# Allegro board PULSE_MODULATION.brd
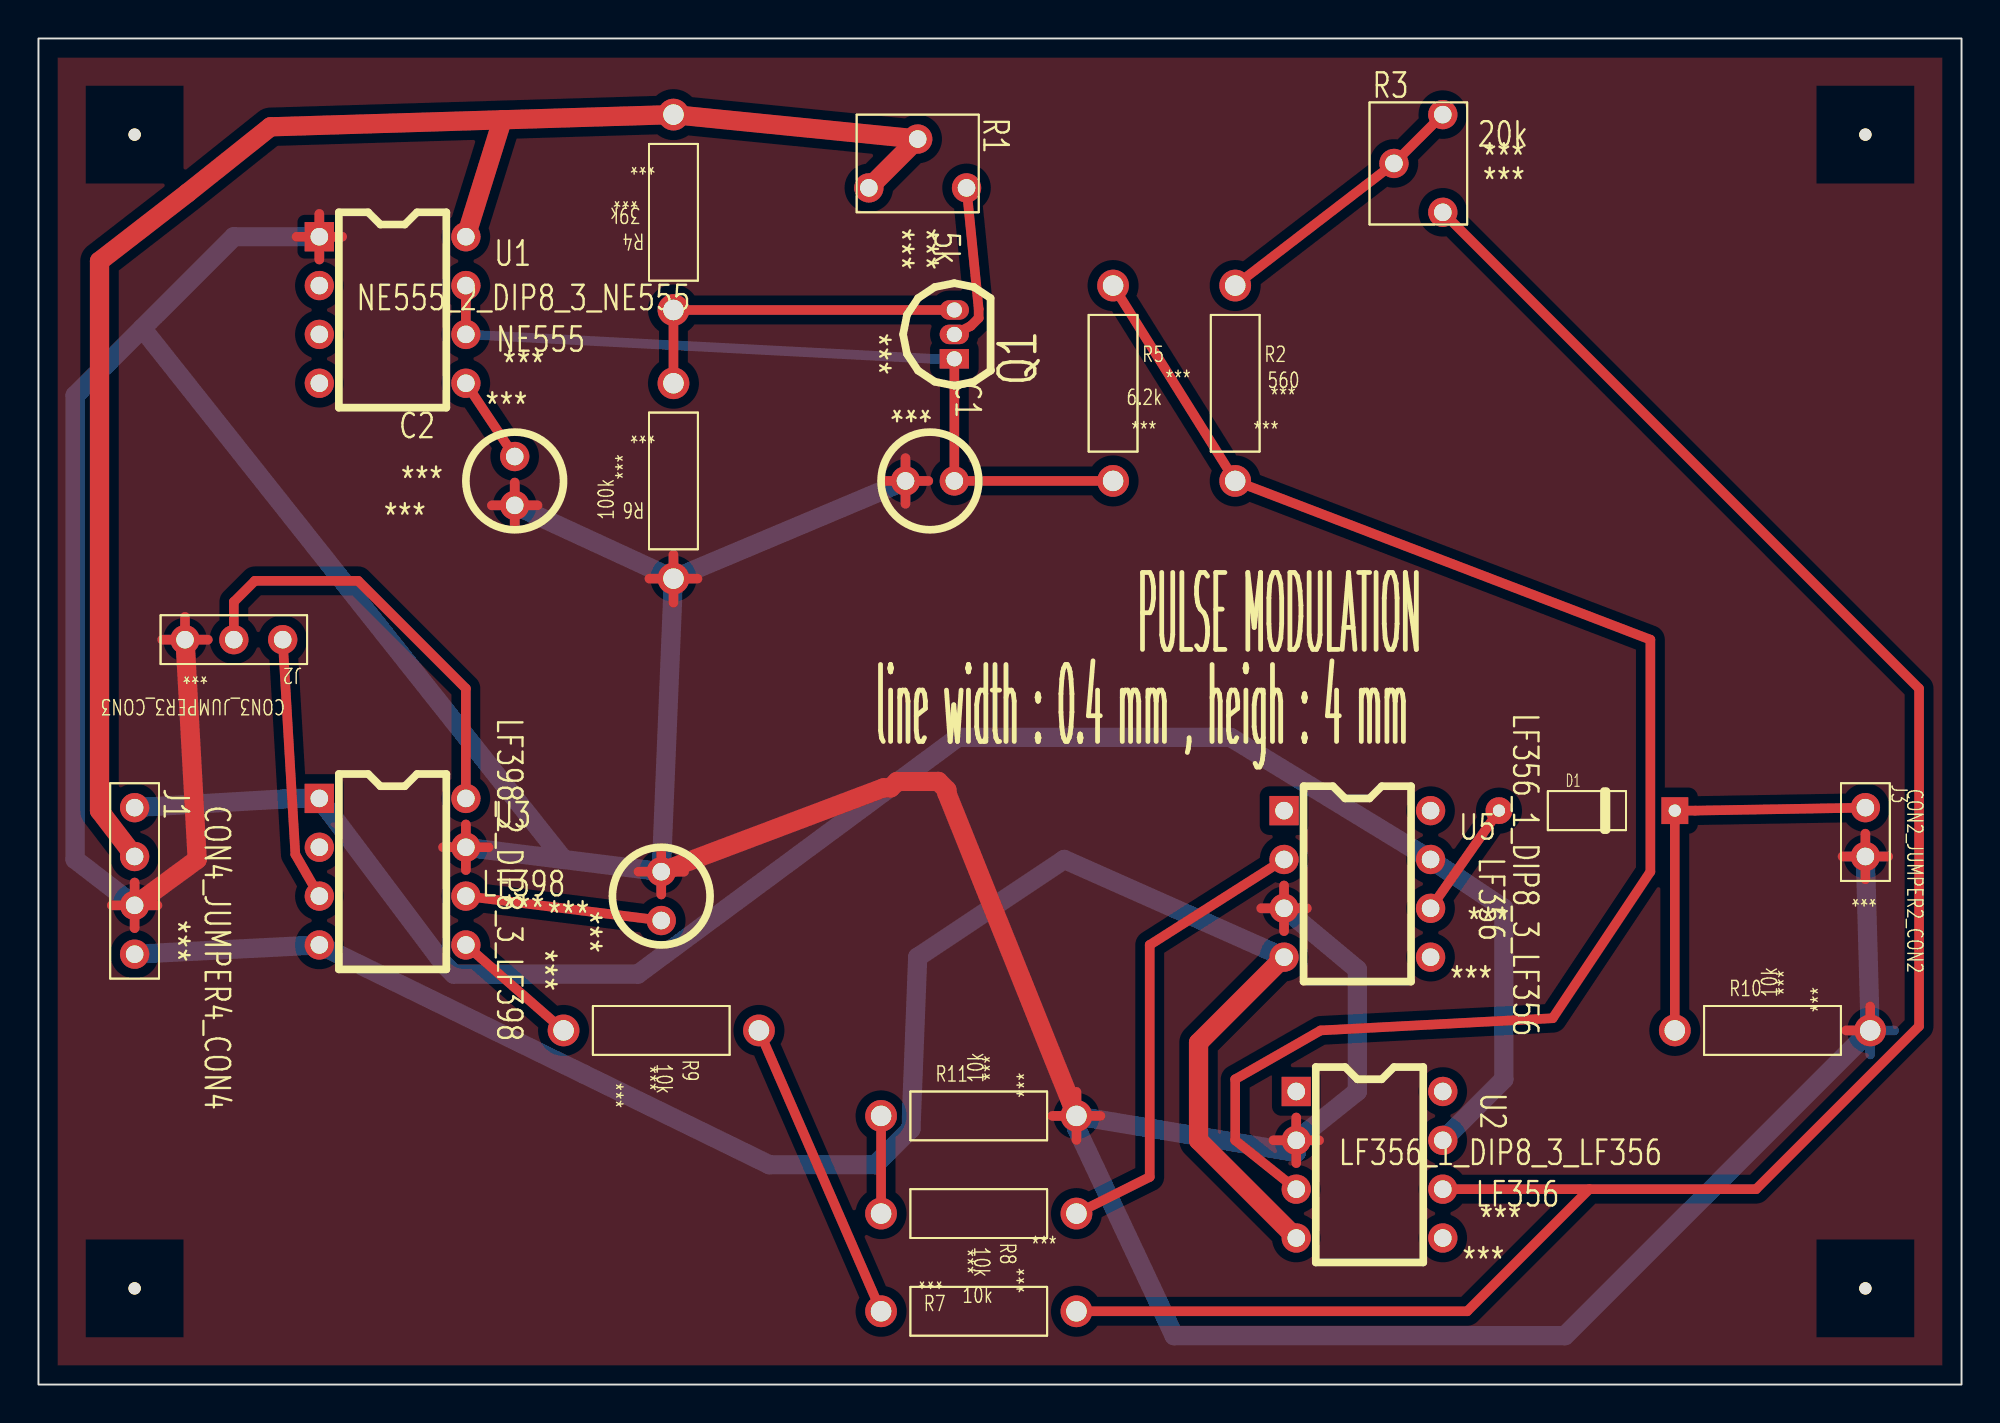
[diagram p0: board, top side]
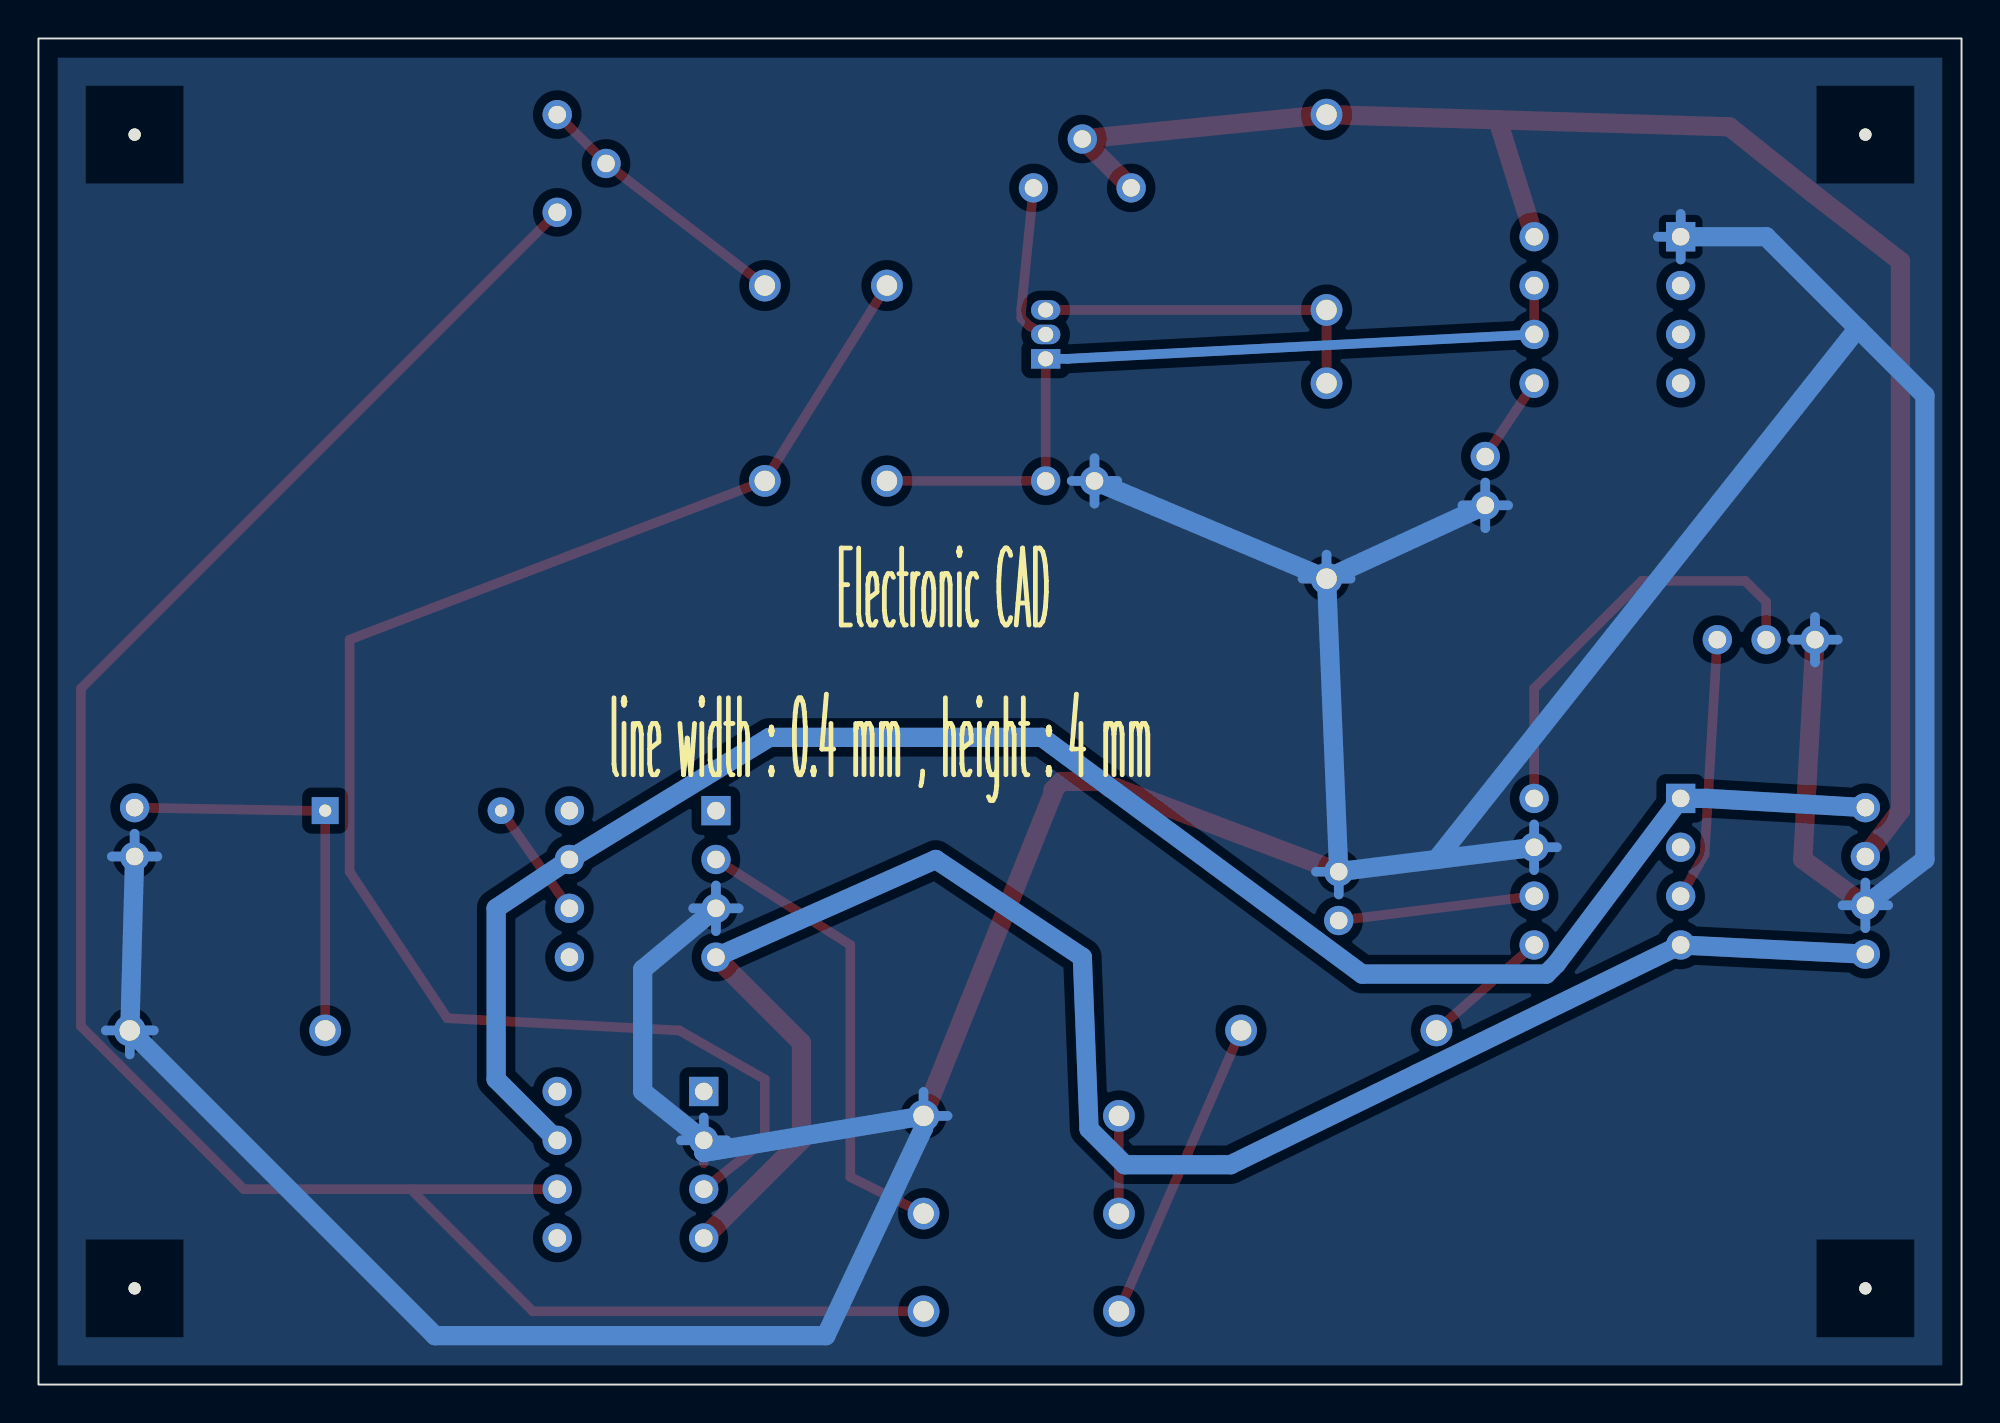
[diagram p1: board, bottom side, seen from below]

Outline 100 x 70 mm; copper layers: TOP, BOTTOM. Coordinates in mm from the lower left corner of the outline.
Outline path: rectangle 0,0 100,70

## Design rules (mm)
constraint set DEFAULT: min track width 0.254
net group POWERRULL: nets +5V +15V -15V
nets with their own width: min track width 0.5; nets CLOCK N01189 N01313 N01331 N01442 N01487 N01674 N02221 N02233 N02639 N02775 N02843 N03068 N03264 N03268 N04697 SIG_1

## Placement (name value [footprint] x y rotation side)
C1  0.01uF  [CAP196]  45.09 46.99 270 top
C2  0.01uF  [CAP196]  24.77 45.72 0 top
C3  0.01uF  [CAP196]  32.38 24.13 0 top
D1  1S1588  [DO35]  85.09 29.84 90 top
J1  CON4  [JUMPER4]  5 30 270 top
J2  CON3  [JUMPER3]  12.7 38.73 180 top
J3  CON2  [JUMPER2]  95 30 270 top
NOREF  -  [unnamed]  5 5 0 top
NOREF#2  -  [#2]  0 70 0 top
NOREF#3  -  [unnamed]  95 65 0 top
NOREF#4  -  [unnamed]  5 65 0 top
NOREF#5  -  [#2]  100 0 90 top
NOREF#6  -  [unnamed]  95 5 0 top
Q1  2SA1015  [TO92]  47.62 53.34 90 top
R1  5k  [RESADJ]  48.26 62.23 270 top
R2  560  [RES400]  62.23 46.99 0 top
R3  20k  [RESADJ]  73.03 66.04 0 top
R4  39k  [RES400]  33.02 66.04 180 top
R5  6.2k  [RES400]  55.88 46.99 0 top
R6  100k  [RES400]  33.02 52.07 180 top
R7  10k  [RES400]  53.98 3.81 90 top
R8  10k  [RES400]  43.81 8.89 270 top
R9  10k  [RES400]  27.3 18.41 270 top
R10  10k  [RES400]  95.25 18.41 90 top
R11  10k  [RES400]  53.98 13.97 90 top
U1  NE555  [DIP8_3]  14.61 59.69 0 top
U2  LF356  [DIP8_3]  65.41 15.24 0 top
U3  LF398  [DIP8_3]  14.61 30.48 0 top
U5  LF356  [DIP8_3]  64.77 29.84 0 top

## Library data of the parts
C1-C3 = C: Tolerance: ***; User Part Number: ***
D1 = DIODE
J1 = CON4: User Part Number: ***
J2 = CON3: User Part Number: ***
J3 = CON2: User Part Number: ***
Q1 = 2SA1020_0
R1 R3 = RESISTOR VAR: Tolerance: ***; User Part Number: ***
R2 R4-R11 = R: Tolerance: ***; User Part Number: ***
U1 = NE555_2: Tolerance: ***; User Part Number: ***
U2 U5 = LF356_1: Tolerance: ***; User Part Number: ***
U3 = LF398_2: Tolerance: ***; User Part Number: ***

## Footprints (pads in the part's own frame, mm; a bottom-side part is the same pattern mirrored in y, then rotated)
CAP196
  round 1.524 hole 0.914: 1(0,0) 2(0,2.54)
DIP8_3
  rect 1.524x1.524 hole 0.914: 1(0,0)
  round 1.524 hole 0.914: 2(0,-2.54) 3(0,-5.08) 4(0,-7.62) 5(7.62,-7.62) 6(7.62,-5.08) 7(7.62,-2.54) 8(7.62,0)
DO35
  rect 1.397x1.397 hole 0.635: 1(0,0)
  round 1.397 hole 0.635: 2(0,9.144)
JUMPER2
  round 1.524 hole 0.914: 1(0,0) 2(2.54,0)
JUMPER3
  round 1.524 hole 0.914: 1(0,0) 2(2.54,0) 3(5.08,0)
JUMPER4
  round 1.524 hole 0.914: 1(0,0) 2(2.54,0) 3(5.08,0) 4(7.62,0)
RES400
  round 1.651 hole 1.067: 1(0,0) 2(0,10.16)
RESADJ
  round 1.524 hole 0.914: 1(0,0) 2(-2.54,-2.54) 3(0,-5.08)
TO92
  rect 1.016x1.524 hole 0.787: 1(0,0)
  oval 1.016x1.524 hole 0.787: 2(1.27,0) 3(2.54,0)
unnamed
  round 0.635 hole 3.175 unplated: (0,0)

## Nets
+5V: J1.2 R1.2(WIPER) R1.3 R4.1 U1.8(VCC)
+15V: J1.1 U2.7 U3.1 U5.7
-15V: J1.4 U2.4(V-) U3.4(V-) U5.4(V-)
GND: C1.1 C2.1 C3.2 J1.3 J2.3 J3.2 R6.2 R10.1 R11.1 U1.1 U2.2 U3.7 U5.3
CLOCK: U1.2
SIG_1: R3.3 R7.1 U2.6
N01189: C2.2 U1.5
N01313: C1.2 Q1.1(E) R5.1 U1.6 U1.7
N01331: R2.1 R5.2 U2.3
N01442: Q1.2 R1.1
N01487: Q1.3 R4.2 R6.1
N01674: R2.2 R3.1 R3.2(WIPER)
N02221: J2.1 U3.3
N02233: J2.2 U3.8
N02639: C3.1 U3.6
N02775: R7.2 R9.2
N02843: R8.1 R11.2
N03068: R8.2 U5.2
N03264: D1.2 U5.6
N03268: D1.1(K) J3.1 R10.2
N04697: R9.1 U3.5

Pads without a net: U1 3 4; U2 1 5 8; U3 2; U5 1 5 8

## Routing (per net, layer and track width the routed paths; a pad name or vN(x,y) marks a point on that pad's centre or on a via; arc(x,y) is an arc through that point)
+5V: length 86.6
  TOP w1: 24.12,65.77 R4.1 R1.2 R1.3 ; 24.12,65.77 12.06,65.41 7.75,61.96 3.17,58.42 3.17,29.84 J1.2 ; 24.12,65.77 U1.8
+15V: length 95.7
  BOTTOM w1: U2.7 76.2,15.88 76.2,24.77 U5.7 61.99,33.66 47.81,33.66 31.17,21.34 21.6,21.34 21.08,21.86 U3.1 13.22,30.48 J1.1
-15V: length 93
  TOP w1: U2.4 60.33,12.7 60.33,17.78 U5.4
  BOTTOM w1: J1.4 U3.4 28.34,16.15 38.01,11.43 43.51,11.43 45.37,13.29 45.72,22.23 53.34,27.3 U5.4
GND: length 387.5
  TOP w0.5: 22.23,26.75 U3.7 ; U3.7 23.41,27.94 ; U3.7 22.23,29.13 ; U3.7 21.04,27.94 ; J1.3 5,26.11 ; J1.3 6.19,24.92 ; J1.3 5,23.73 ; J1.3 3.81,24.92 ; 14.61,58.5 U1.1 ; U1.1 15.79,59.69 ; U1.1 13.42,59.69 ; U1.1 14.61,60.88 ; U2.2 65.41,13.89 ; U2.2 66.59,12.7 ; U2.2 64.22,12.7 ; U2.2 65.41,11.51 ; C2.1 24.77,46.91 ; C2.1 23.58,45.72 ; C2.1 25.95,45.72 ; C2.1 24.77,44.53 ; U5.3 64.77,25.95 ; U5.3 65.96,24.77 ; U5.3 63.58,24.77 ; U5.3 64.77,23.58 ; J3.2 95,28.65 ; J3.2 95,26.27 ; J3.2 96.19,27.46 ; J3.2 93.81,27.46 ; C3.2 33.57,26.67 ; C3.2 31.2,26.67 ; C3.2 32.38,27.86 ; C3.2 32.38,25.48 ; 6.43,38.73 J2.3 ; J2.3 7.62,37.55 ; J2.3 8.81,38.73 ; J2.3 7.62,39.92 ; 31.77,41.91 R6.2 ; R6.2 33.02,40.66 ; R6.2 34.27,41.91 ; R6.2 33.02,43.16 ; R11.1 55.22,13.97 ; R11.1 53.98,12.72 ; R11.1 53.98,15.22 ; R11.1 52.73,13.97 ; 94,18.41 R10.1 95.25,19.66 ; 43.9,46.99 C1.1 ; C1.1 46.27,46.99 ; C1.1 45.09,45.8 ; C1.1 45.09,48.18
  TOP w1: R11.1 47.24,30.75 47.24,30.92 46.79,31.36 44.65,31.36 44.32,31.03 43.95,31.03 C3.2 ; J2.3 8.26,27.3 J1.3
  BOTTOM w0.5: 23.58,45.72 C2.1 ; C2.1 25.95,45.72 ; C2.1 24.77,46.91 ; C2.1 24.77,44.53 ; R10.1 96.5,18.41 ; R10.1 94,18.41 ; R10.1 95.25,17.17 ; R10.1 95.25,19.66 ; 63.58,24.77 U5.3 ; U5.3 64.77,25.95 ; U5.3 64.77,23.58 ; U5.3 65.96,24.77 ; J3.2 95,28.65 ; J3.2 96.19,27.46 ; J3.2 93.81,27.46 ; J3.2 95,26.27 ; 5,23.73 J1.3 ; J1.3 5,26.11 ; J1.3 6.19,24.92 ; J1.3 3.81,24.92 ; 22.23,26.75 U3.7 ; U3.7 22.23,29.13 ; U3.7 21.04,27.94 ; U3.7 23.41,27.94 ; J2.3 8.81,38.73 ; J2.3 7.62,37.55 ; J2.3 6.43,38.73 ; J2.3 7.62,39.92 ; R6.2 34.27,41.91 ; R6.2 33.02,43.16 ; R6.2 33.02,40.66 ; R6.2 31.77,41.91 ; R11.1 53.98,15.22 ; R11.1 55.22,13.97 ; R11.1 52.73,13.97 ; 14.61,58.5 U1.1 ; U1.1 14.61,60.88 ; U1.1 15.79,59.69 ; 45.09,45.8 C1.1 ; C1.1 45.09,48.18 ; C1.1 46.27,46.99 ; C1.1 43.9,46.99 ; 64.22,12.7 U2.2 ; U2.2 65.41,13.89 ; U2.2 66.59,12.7 ; C3.2 32.38,27.86 ; C3.2 33.57,26.67 ; C3.2 31.2,26.67 ; C3.2 32.38,25.48
  BOTTOM w1: C1.1 R6.2 ; R6.2 C2.1 ; R6.2 C3.2 27.3,27.3 ; U3.7 27.3,27.3 ; 27.3,27.3 5.4,54.93 ; 5.4,54.93 10.16,59.69 U1.1 ; 5.4,54.93 1.91,51.44 1.91,27.3 J1.3 ; J3.2 R10.1 79.38,2.54 59.05,2.54 53.98,13.34 R11.1 65.41,12.06 U2.2 68.58,15.24 68.58,21.59 U5.3
SIG_1: length 110.2
  TOP w0.5: R7.1 74.3,3.81 80.64,10.16 ; 80.64,10.16 U2.6 ; 80.64,10.16 89.32,10.16 97.79,18.63 97.79,36.2 R3.3
N01189: length 4.6
  TOP w0.5: U1.5 C2.2
N01313: length 42.6
  TOP w0.5: Q1.1 C1.2 R5.1 ; U1.7 U1.6
  BOTTOM w0.5: Q1.1 46.49,53.34 U1.6
N01331: length 80.8
  TOP w0.5: R5.2 R2.1 83.82,38.73 83.82,26.67 78.74,19.05 66.67,18.41 62.23,15.88 62.23,12.7 U2.3
N01442: length 8.3
  TOP w0.5: R1.1 48.89,55.93 48.89,55.46 48.48,55.05 Q1.2
N01487: length 18.4
  TOP w0.5: Q1.3 R4.2 R6.1
N01674: length 14
  TOP w0.5: R3.1 R3.2 R2.2
N02221: length 13.7
  TOP w0.5: U3.3 13.36,27.57 J2.1
N02233: length 22.5
  TOP w0.5: J2.2 10.16,40.7 11.25,41.79 16.63,41.79 22.23,36.2 U3.8
N02639: length 10.2
  TOP w0.5: U3.6 C3.1
N02775: length 15.9
  TOP w0.5: R7.2 R9.2
N02843: length 5.1
  TOP w0.5: R8.1 R11.2
N03068: length 24.6
  TOP w0.5: U5.2 57.78,22.86 57.78,10.79 53.98,8.89
N03264: length 6.2
  TOP w0.5: D1.2 U5.6
N03268: length 21.3
  TOP w0.5: R10.2 D1.1 86.17,29.84 J3.1
N04697: length 6.8
  TOP w0.5: R9.1 U3.5

## Copper pours and planes (outline as drawn; the poured copper is in the pictures)
GND on TOP, BOTTOM: 1,69 99,69 99,1 1,1

## Text on the board
Ref Des/Silkscreen Bottom: line width : 0.4 mm , height : 4 mm | Electronic CAD
Ref Des/Silkscreen Top: line width : 0.4 mm , heigh : 4 mm | PULSE MODULATION
COMPVAL_TYPE_TOP: FIGURE | FINISHED_SIZE | 0.635 | 0.7874 | 0.9144 | 1.0668 | 3.175 | DRILL CHART: TOP to BOTTOM | ALL UNITS ARE IN MILLIMETERS | PLATED | NON-PLATED | QTY | 2 | 3 | 53 | 18 | 4
